# Altium PCB AS5600.PcbDoc
Units mm, origin at the board's own origin, x right, y up, seen from the top; angles counter-clockwise.
Board outline 24 x 20.18 mm, 2 copper layers (Top Layer, Bottom Layer), stack 1.579 mm thick; 16 components, 9 nets, 44 pads, 144 vias.
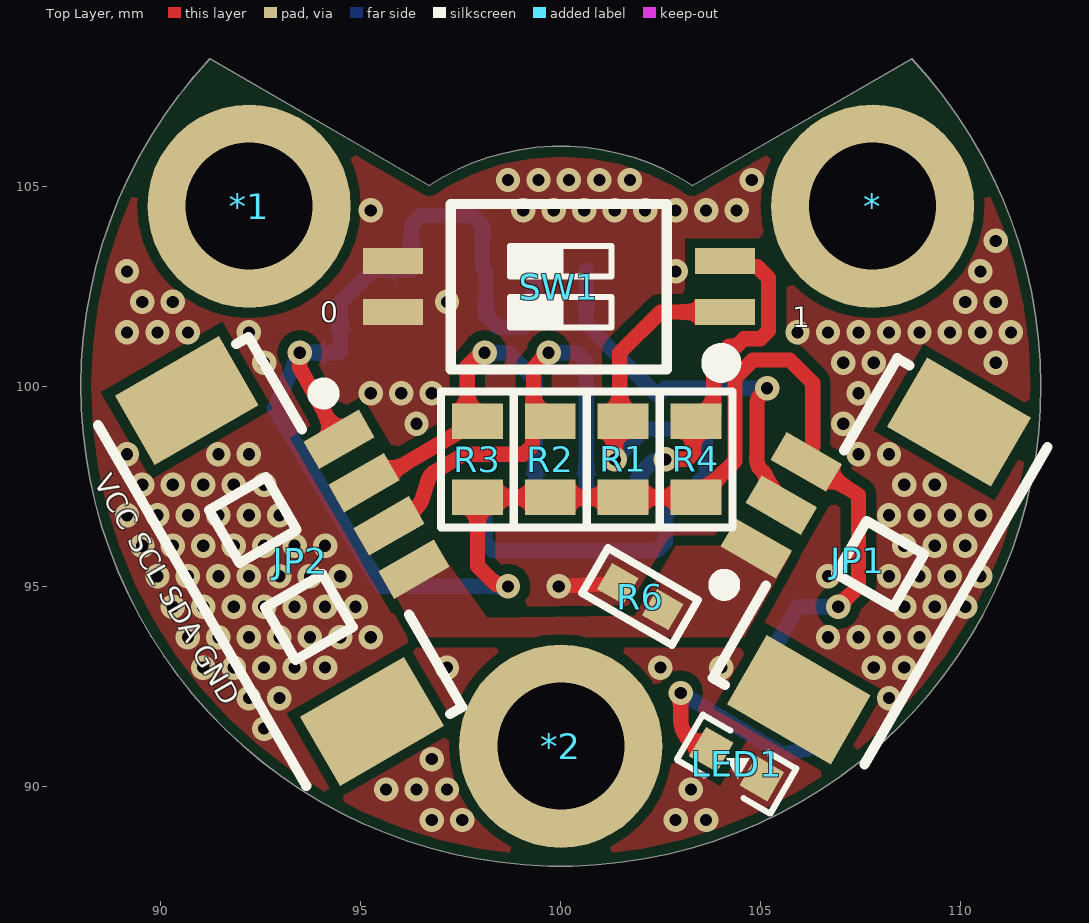
[diagram p0: Top Layer view]
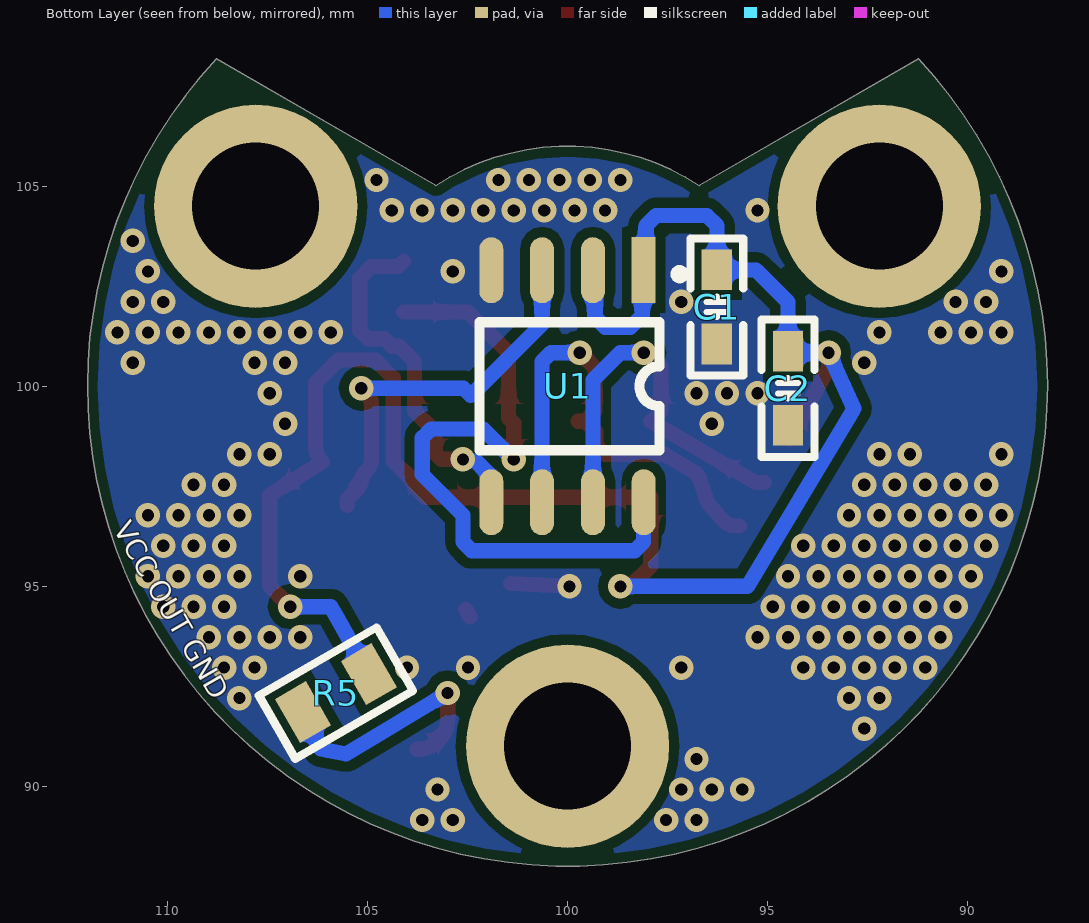
[diagram p1: Bottom Layer view, seen from below]

## Layer stack, top to bottom
Top Solder: solder mask 0.0102, Solder Resist, Dk 3.5
Top Layer: signal copper 0.0356
Dielectric 1: dielectric 1.508, FR-4, Dk 4.8
Bottom Layer: signal copper 0.0356
Bottom Solder: solder mask 0.0102, Solder Resist, Dk 3.5

## Board outline
91.224,108.184 ccw(c100,100) 108.776,108.184 103.29,105.017 ccw(c100,100) 96.71,105.017

## Design rules (kind name [scope] priority, off if disabled: settings)
AssemblyTestpoint AssemblyTestpoint_1 [All] p2: testpointundercomponent=TRUE minsize=1.016 maxsize=2.54 preferedsize=1.524 minholesize=0 maxholesize=1.016 preferedholesize=0.813 testpointgrid=0.025 usegrid=TRUE gridtolerance=0 allowsidetop=TRUE allowsidebottom=TRUE
Clearance Poly [InPolygon] p1: gap=0.254 ignorepadtopadclearanceinfootprint=FALSE
Clearance [All] p2: gap=0.152 ignorepadtopadclearanceinfootprint=FALSE
PolygonConnect POWER1 [All] p1: connectstyle=Direct reliefconductorwidth=0.254 reliefentries=4 polygonreliefangle="90 Angle" airgapwidth=0.254
PolygonConnect Via [IsVia] p2: connectstyle=Direct reliefconductorwidth=0.254 reliefentries=4 polygonreliefangle="90 Angle" airgapwidth=0.254
PolygonConnect [All] p3: connectstyle=Relief reliefconductorwidth=0.254 reliefentries=4 polygonreliefangle="90 Angle" airgapwidth=0.254
RoutingVias [All] p1: holewidth=0.305 width=0.61 viastyle="Through Hole" minholewidth=0.305 minwidth=0.61 maxholewidth=0.305 maxwidth=0.61
SolderMaskExpansion [All] p1: expansion=0.064 istentingtop=FALSE
Width POWER [InNetClass('POWER')] p1: maxlimit=1.524 minlimit=0.381 preferedwidth=0.381
Width [All] p2: maxlimit=1.524 minlimit=0.254 preferedwidth=0.381 minimp=50.000000 maximp=50.000000 favimp=50.000000
30 further rules are at their usual default settings.

## Classes and differential pairs
net class DENGCHANG: SCL SDA

## Components (designator, comment, footprint, x,y, rotation, side; value= is the part's Value field where it differs from the comment)
* "M3" "M3 125X200"#1 117.856,106.934 r0 top
*1 "M3" "M3 125X200"#2 85.471,106.172 r0 top
*2 "M3" "M3 125X200"#3 115.697,87.63 r0 top
C1 "106" "C 0603_M" 96.266,101.981 r90 bottom
C2 "104" "C 0603_M" 94.488,99.949 r90 bottom
JP1 "HDR-1X3" "MX 1.25-WS-3P" 107.95,95.631 r60 top
JP2 "HDR-1X4" "MX 1.25-WS-4P" 92.964,95.631 r300 top
LED1 "红色" "LED 0603G" 104.394,90.551 r330 top
R1 "1K" "R 0805_L" 101.558,98.171 r270 top
R2 "4.7K" "R 0805_L" 99.737,98.171 r270 top
R3 "4.7K" "R 0805_L" 97.917,98.171 r270 top
R4 "1K" "R 0805_L" 103.378,98.171 r90 top
R5 "4.7K" "R 0805_L" 105.791,92.329 r150 bottom
R6 "0R" "R 0603_L" 101.981,94.742 r330 top
SW1 "CSW-2P" "CSW1.27 SMD-2P" 99.949,102.489 r90 top
U1 "AS5600" SOIC_8 100,100 r0 bottom

## Footprints (in the part's own frame and the unit in brackets; to place one, negate y for a bottom-side part, rotate by r counter-clockwise, add the part's x,y. Pads: shape width x height; smd on the part's side, far side on the other; paste and mask are expansions set on the pad)
"C 0603_M" [mil] "无极性贴片电容"
  rect 40x30 smd: 1(-36.5,0) 2(36.5,0)
  silkscreen extent -68,-26 68,26, body extent -31,-16 31,16, height 32
"CSW1.27 SMD-2P" [mm] "长：4.14mm，宽：5.4mm，高：2.3mm"
  rect 0.65x1.5 smd: 1(-0.635,-4.15) 2(0.635,-4.15) 3(0.635,4.15) 4(-0.635,4.15)
  silkscreen extent -2.15,-4.31 2.07,2.7, body extent -2.07,-4.35 2.07,4.35, height 2.35
"LED 0603G" [mm]
  rect 0.8x0.85 smd: 1(-0.73,0) 2(0.73,0)
  silkscreen extent -1.35,-0.65 1.35,0.65, body extent -0.8,-0.4 0.8,0.4, height 0.47
"M3 125X200"#1 [mm] "M3螺丝孔，孔125Mil，焊盘200Mil"
  round 5.08 hole 3.175: 1(-10.062,-2.434)
"M3 125X200"#2 [mm] "M3螺丝孔，孔125Mil，焊盘200Mil"
  round 5.08 hole 3.175: 1(6.735,-1.672)
"M3 125X200"#3 [mm] "M3螺丝孔，孔125Mil，焊盘200Mil"
  round 5.08 hole 3.175: 1(-15.697,3.37)
"MX 1.25-WS-3P" [mm] "长：8.9mm，宽：4.2mm，高：3.4mm"
  rect 2x3 smd: 0(-4.007,0) 0(4.007,0)
  rect 0.8x1.6 smd: 1(-1.264,2.811) 2(-0.014,2.811) 3(1.236,2.811)
  silkscreen extent -4.61,-2.23 4.62,3.25, body extent -4.45,-2.1 4.45,3.09, height 3.4
"MX 1.25-WS-4P" [mm] "长：10.15mm，宽：4.2mm，高：3.4mm"
  rect 2x3 smd: 0(-4.632,0) 0(4.632,0)
  rect 0.8x1.6 smd: 1(-1.889,2.811) 2(-0.639,2.811) 3(0.611,2.811) 4(1.861,2.811)
  silkscreen extent -5.23,-2.23 5.45,3.25, body extent -5.07,-2.1 5.07,3.09, height 3.4
"R 0603_L" [mil] "1/10W贴片电阻"
  rect 30x30 smd: 1(-25.59,0) 2(25.59,0)
  silkscreen extent -51,-26 51,26, body extent -31,-16 32,16, height 16
"R 0805_L" [mil] "1/8W贴片电阻"
  rect 35x50 smd: 1(-37.4,0) 2(37.4,0)
  silkscreen extent -67,-36 67,36, body extent -39,-25 39,25, height 20
SOIC_8 [mm]
  rect 0.6x1.65 smd: 1(-1.905,-2.9)
  oval 0.6x1.65 smd: 2(-0.635,-2.9) 3(0.635,-2.9) 4(1.905,-2.9) 5(1.905,2.9) 6(0.635,2.9) 7(-0.635,2.9) 8(-1.905,2.9)
  silkscreen extent -2.9,-2.9 2.2,1.6, body extent -2.5,-3.01 2.5,3.01, height 1.75

## Part data
* *1 *2: "铜柱孔", BOM名称=铜柱孔, 版权归属=源创客, 学习资源=www.ooocke.com
C1 C2: library part C, "无极性贴片电容", BOM名称=无极性贴片电容, 版权归属=源创客, 学习资源=www.ooocke.com
JP1: library part "Header 3", "3P接插件", BOM名称=3P接插件, 版权归属=源创客, 学习资源=www.ooocke.com
JP2: library part "Header 4", "4P接插件", BOM名称=4P接插件, 版权归属=源创客, 学习资源=www.ooocke.com
LED1: library part LED-SMD, "贴片LED", BOM名称=贴片LED, 版权归属=源创客, 学习资源=www.ooocke.com
R1 R2 R3 R4 R5 R6: library part R, "贴片电阻", BOM名称=贴片电阻, 版权归属=源创客, 学习资源=www.ooocke.com
SW1: "2路编码开关", BOM名称=2路编码开关, 版权归属=源创客, 学习资源=www.ooocke.com

## Via types
v1: diameter 0.61, hole 0.305, Top Layer to Bottom Layer, 144 vias

## Nets (pads, with @x,y where several pads share a name; then routed paths per layer and width w, separated by ;. In a path a pad name is that pad's centre, name@x,y a point inside that pad or via, vN(x,y) a via of type N, cw(c..) or ccw(c..) an arc to the next point about the centre after c; other vN are vias at no path point)
DGND: C1.1 C2.1 LED1.2 R6.1 SW1.3 SW1.4 U1.4 | length 1.5
  Top Layer w0.381: v1(99.949,94.996) R6.1
  other v1: 96.774,89.154 97.536,89.154 102.87,89.154 103.632,89.154 95.631,89.916 96.393,89.916 97.155,89.916 103.251,89.916 96.774,90.678 92.583,91.44 92.202,92.202 92.964,92.202 108.204,92.202 91.059,92.964 91.821,92.964 92.583,92.964 93.345,92.964 94.107,92.964 97.155,92.964 102.489,92.964 104.013,92.964 107.823,92.964 108.585,92.964 90.678,93.726 91.44,93.726 92.202,93.726 92.964,93.726 93.726,93.726 94.488,93.726 95.25,93.726 106.68,93.726 107.442,93.726 108.204,93.726 108.966,93.726 90.297,94.488 91.059,94.488 91.821,94.488 92.583,94.488 93.345,94.488 94.107,94.488 94.869,94.488 108.585,94.488 109.347,94.488 110.109,94.488 89.916,95.25 90.678,95.25 91.44,95.25 92.202,95.25 92.964,95.25 93.726,95.25 94.488,95.25 106.68,95.25 108.204,95.25 108.966,95.25 109.728,95.25 110.49,95.25 89.535,96.012 90.297,96.012 91.059,96.012 91.821,96.012 92.583,96.012 93.345,96.012 94.107,96.012 108.585,96.012 109.347,96.012 110.109,96.012 89.154,96.774 89.916,96.774 90.678,96.774 91.44,96.774 92.202,96.774 92.964,96.774 108.204,96.774 108.966,96.774 109.728,96.774 110.49,96.774 89.535,97.536 90.297,97.536 91.059,97.536 91.821,97.536 92.583,97.536 108.585,97.536 109.347,97.536 89.154,98.298 91.44,98.298 92.202,98.298 107.442,98.298 108.204,98.298 96.393,99.06 107.061,99.06 95.25,99.822 96.012,99.822 96.774,99.822 107.442,99.822 92.583,100.584 107.061,100.584 107.823,100.584 110.871,100.584 89.154,101.346 89.916,101.346 90.678,101.346 92.202,101.346 105.918,101.346 106.68,101.346 107.442,101.346 108.204,101.346 108.966,101.346 109.728,101.346 110.49,101.346 111.252,101.346 89.535,102.108 90.297,102.108 97.155,102.108 110.109,102.108 110.871,102.108 89.154,102.87 102.87,102.87 110.49,102.87 110.871,103.632 95.25,104.394 99.06,104.394 99.822,104.394 100.584,104.394 101.346,104.394 102.108,104.394 102.87,104.394 103.632,104.394 104.394,104.394 98.679,105.156 99.441,105.156 100.203,105.156 100.965,105.156 101.727,105.156 104.775,105.156
DIR: R1.1 SW1.1 U1.8 | length 17.2
  Top Layer w0.381: v1(101.346,98.171) 101.346,99.079 101.473,99.206 101.473,100.838 102.489,101.854 SW1.1
  Bottom Layer w0.381: U1.8 98.099,97.096 98.099,96.108 98.322,95.885 102.393,95.885 102.616,96.108 102.616,96.774 103.632,97.79 103.632,98.71 103.409,98.933 102.108,98.933 v1(101.346,98.171)
GND: JP1.1 JP2.4 R6.2 | length 0.2
  Top Layer w0.381: R6.2@102.443,94.232 R6.2
NetLED1_1: LED1.1 R5.1 | length 6.8
  Top Layer w0.381: v1(102.997,92.329) 102.997,91.681 ccw(c103.762,91.681) LED1.1 LED1.1@103.762,90.925
  Bottom Layer w0.381: v1@103.041,92.285 v1(102.997,92.329) 105.411,90.881 105.537,90.805 105.985,90.895 106.172,90.932 R5.1 R5.1@106.614,91.628
OUT: JP1.2 U1.3 | length 9.9
  Top Layer w0.381: v1(105.156,99.949) 105.014,99.807 ccw(c105.283,99.537) 104.902,99.537 104.902,98.306 cw(c104.521,98.305) 104.902,98.287 104.899,98.223 ccw(c105.279,98.206) 104.898,98.206 104.898,98.16 ccw(c105.241,98.16) 104.998,97.919 105.02,97.897 ccw(c105.29,98.166) 105.025,97.892 105.041,97.877 105.042,97.876 cw(c104.775,97.604) 105.149,97.676 105.163,97.604 ccw(c105.537,97.677) 105.268,97.408 105.509,97.166 JP1.2
  Bottom Layer w0.381: U1.3 100.635,101.549 102.417,99.767 102.599,99.949 v1(105.156,99.949)
PGO: R4.2 SW1.2 U1.5 | length 9.1
  Top Layer w0.381: v1(102.616,98.171) 103.155,98.171 103.312,98.328 103.312,98.867 103.566,99.121 103.569,99.121 103.823,99.375 103.823,100.615 104.209,101.001 104.393,101.001 104.578,101.186 104.991,101.186 105.192,101.387 105.192,102.707 104.91,102.989 104.233,102.989 SW1.2
  Bottom Layer w0.381: U1.5 101.905,97.684 102.014,97.794 102.014,97.849 102.293,98.127 102.572,98.127 v1(102.616,98.171)
SCL: JP2.2 R3.1 U1.7 | length 9.9
  Top Layer w0.381: JP2.2 95.304,97.59 R3.1 97.663,99.375 97.663,100.501 97.957,100.794 98.051,100.794 v1(98.095,100.838)
  Bottom Layer w0.381: v1(98.095,100.838) 98.679,100.838 99.365,100.152 U1.7
SDA: JP2.3 R2.1 U1.6 | length 12
  Top Layer w0.381: JP2.3 95.843,96.515 ccw(c95.821,96.895) 96.105,96.642 96.443,97.022 ccw(c96.159,97.275) 96.52,97.156 96.688,97.659 cw(c97.049,97.539) 96.852,97.864 97.544,98.284 97.567,98.298 99.07,98.298 99.293,98.521 99.293,98.867 99.547,99.121 R2.1@99.568,99.121 ; v1(99.695,100.838) 99.314,100.457 99.314,99.375 R2.1@99.568,99.121 ; R2.1 R2.1@99.568,99.121
  Bottom Layer w0.381: v1(99.695,100.838) 100.412,100.838 100.635,100.615 U1.6
VDD3V3: C1.2 C2.2 JP1.3 JP2.1 R1.2 R2.2 R3.2 R4.1 R5.2 U1.1 U1.2 | length 48.2
  Top Layer w0.381: v1(93.472,100.838) 93.472,100.457 93.519,100.371 JP2.1 ; v1(98.679,94.996) 98.635,95.04 98.381,95.04 97.917,95.504 R3.2 R2.2 R1.2 R4.1 103.569,97.221 103.823,97.475 103.823,97.6 104.356,98.133 104.356,100.209 104.799,100.653 105.722,100.653 106.299,100.076 106.299,98.505 cw(c105.736,98.505) JP1.3 107.442,97.282 107.442,94.996 v1(106.934,94.488)
  Bottom Layer w0.381: v1(98.679,94.996) 95.504,94.996 92.94,99.269 92.837,99.441 v1(93.472,100.838) 94.45,100.838 C2.2 94.488,102.108 95.288,102.908 C1.2 96.266,104.013 96.52,104.267 97.79,104.267 98.04,104.017 98.04,102.954 U1.1 98.132,102.862 98.132,101.766 98.425,101.473 99.06,101.473 99.314,101.727 99.314,102.169 99.323,102.178 99.323,102.858 U1.2 ; R5.2 105.809,94.294 105.918,94.488 v1(106.934,94.488)
pads on no net: *1.1 *2.1 *.1 JP1.0 JP2.0

## Polygon pours and split planes (outlines as drawn)
DGND on Top Layer "DGND_L01_P004" (solid, remove dead copper, pour order 4): 91.224,108.184 ccw(c100,100) 108.776,108.184 103.29,105.017 ccw(c100,100) 96.71,105.017
GND on Top Layer "GND_L01_P000" (solid, remove dead copper, pour order 0): 95.504,95.377 95.885,94.742 96.449,93.726 104.592,93.726 105.791,95.885 104.394,96.647 104.013,96.012 102.87,96.012 101.85,94.264 98.155,94.206 96.774,96.139
no net on Mechanical 1 (solid): 91.224,108.184
DGND on Bottom Layer "DGND_L02_P005" (solid, remove dead copper, pour order 5): 91.224,108.184 ccw(c100,100) 108.776,108.184 103.29,105.017 ccw(c100,100) 96.71,105.017

## Silkscreen, mask and mechanical layers (free items; w line width, h text height)
Top Overlay:
  text "0" at 93.98,101.6 h0.51
  text "1" at 105.791,101.473 h0.51
  text "VCC SCL SDA GND" at 88.311,97.617 h0.51 r300
Bottom Overlay:
  text "VCC OUT GND" at 111.374,96.432 h0.51 r60
Mechanical 1:
  the board outline again, w0.013